# Altium PCB PCB1.PcbDoc
Units mm, origin at the board's own origin, x right, y up, seen from the top; angles counter-clockwise.
Board outline 16 x 16 mm, 4 copper layers (Top Layer, Int1 (GND), Int2 (GND), Bottom Layer), stack 1.369 mm thick; 23 components, 26 nets, 106 pads, 39 vias.
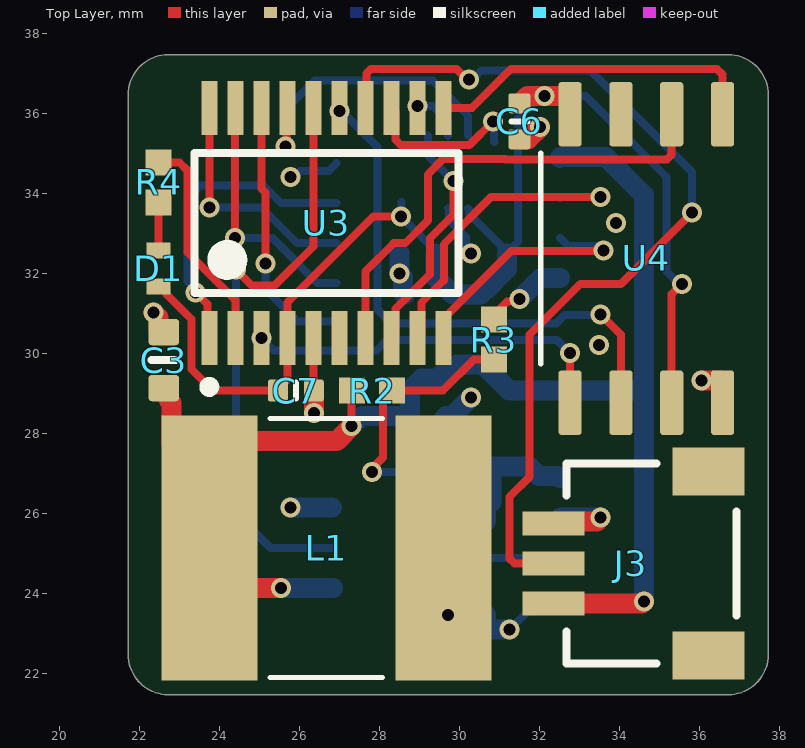
[diagram p0: Top Layer view]
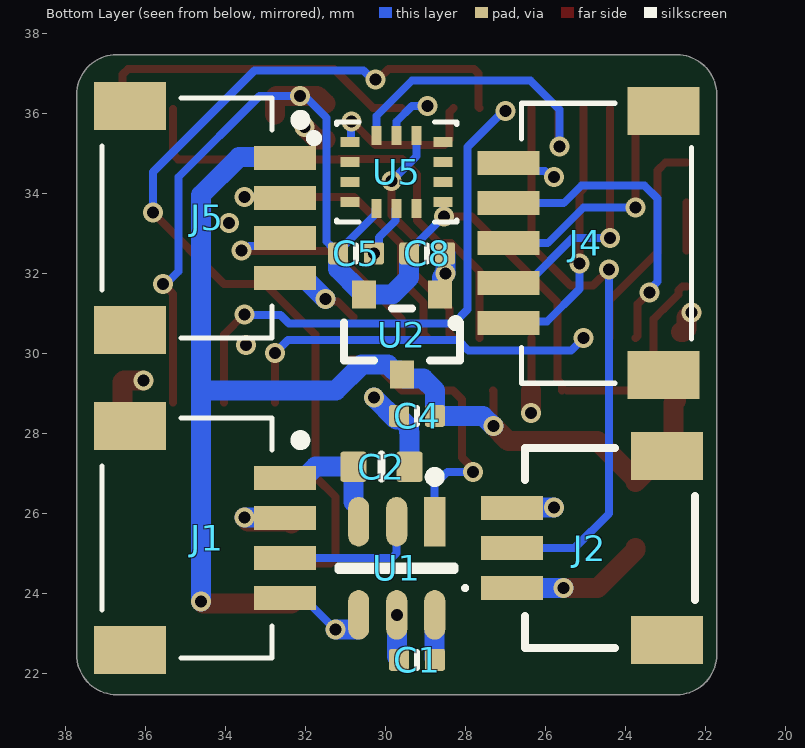
[diagram p1: Bottom Layer view, seen from below]
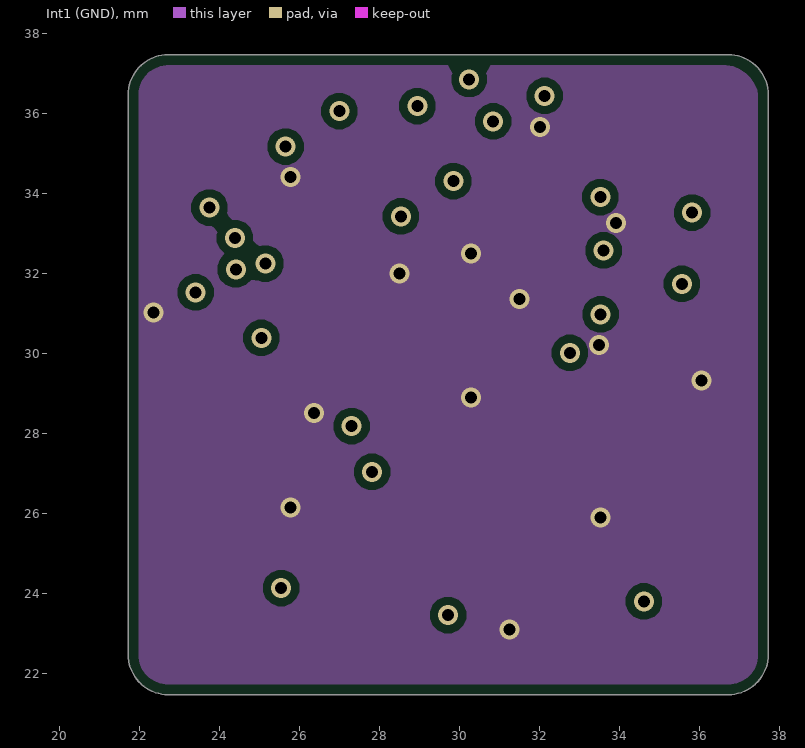
[diagram p2: Int1 (GND)]
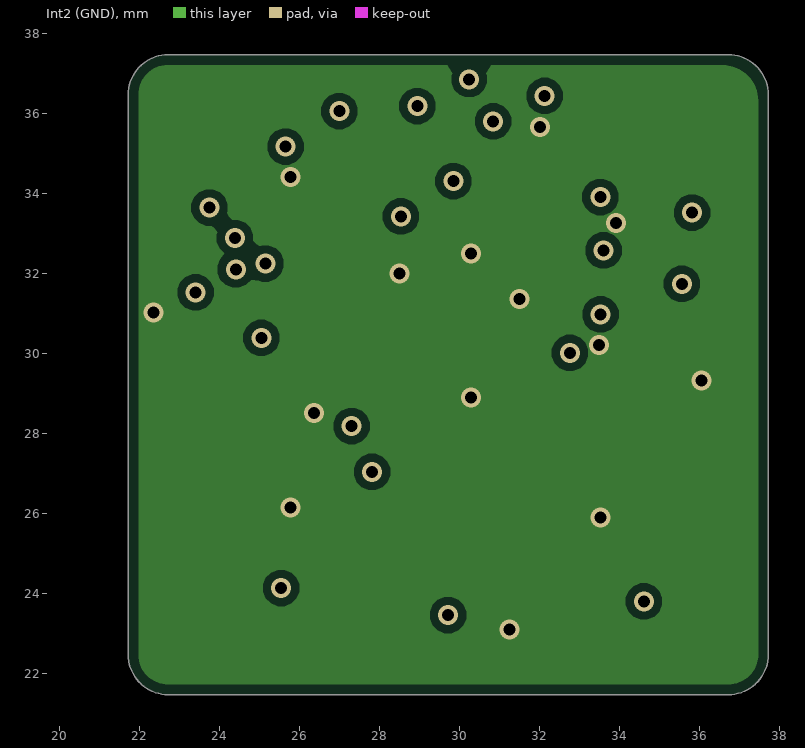
[diagram p3: Int2 (GND)]
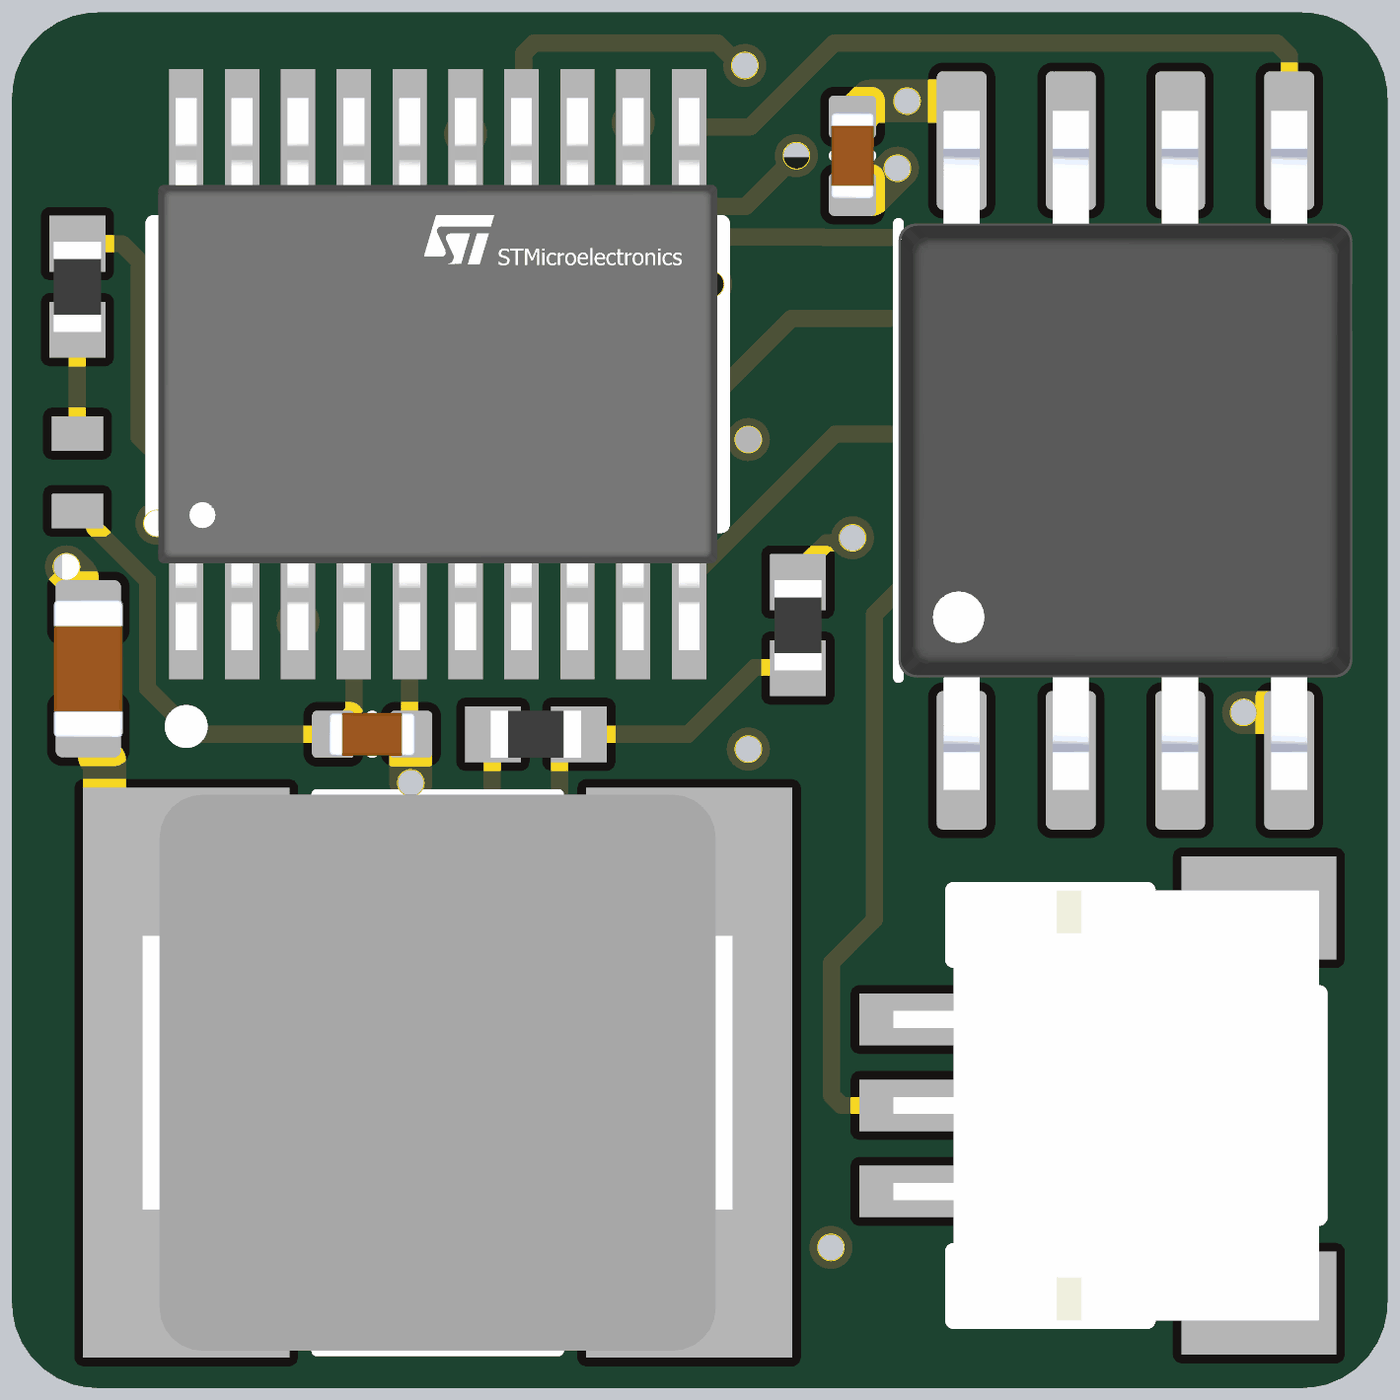
[diagram p4: 3D render of the assembled board from above, using the file's embedded part models]
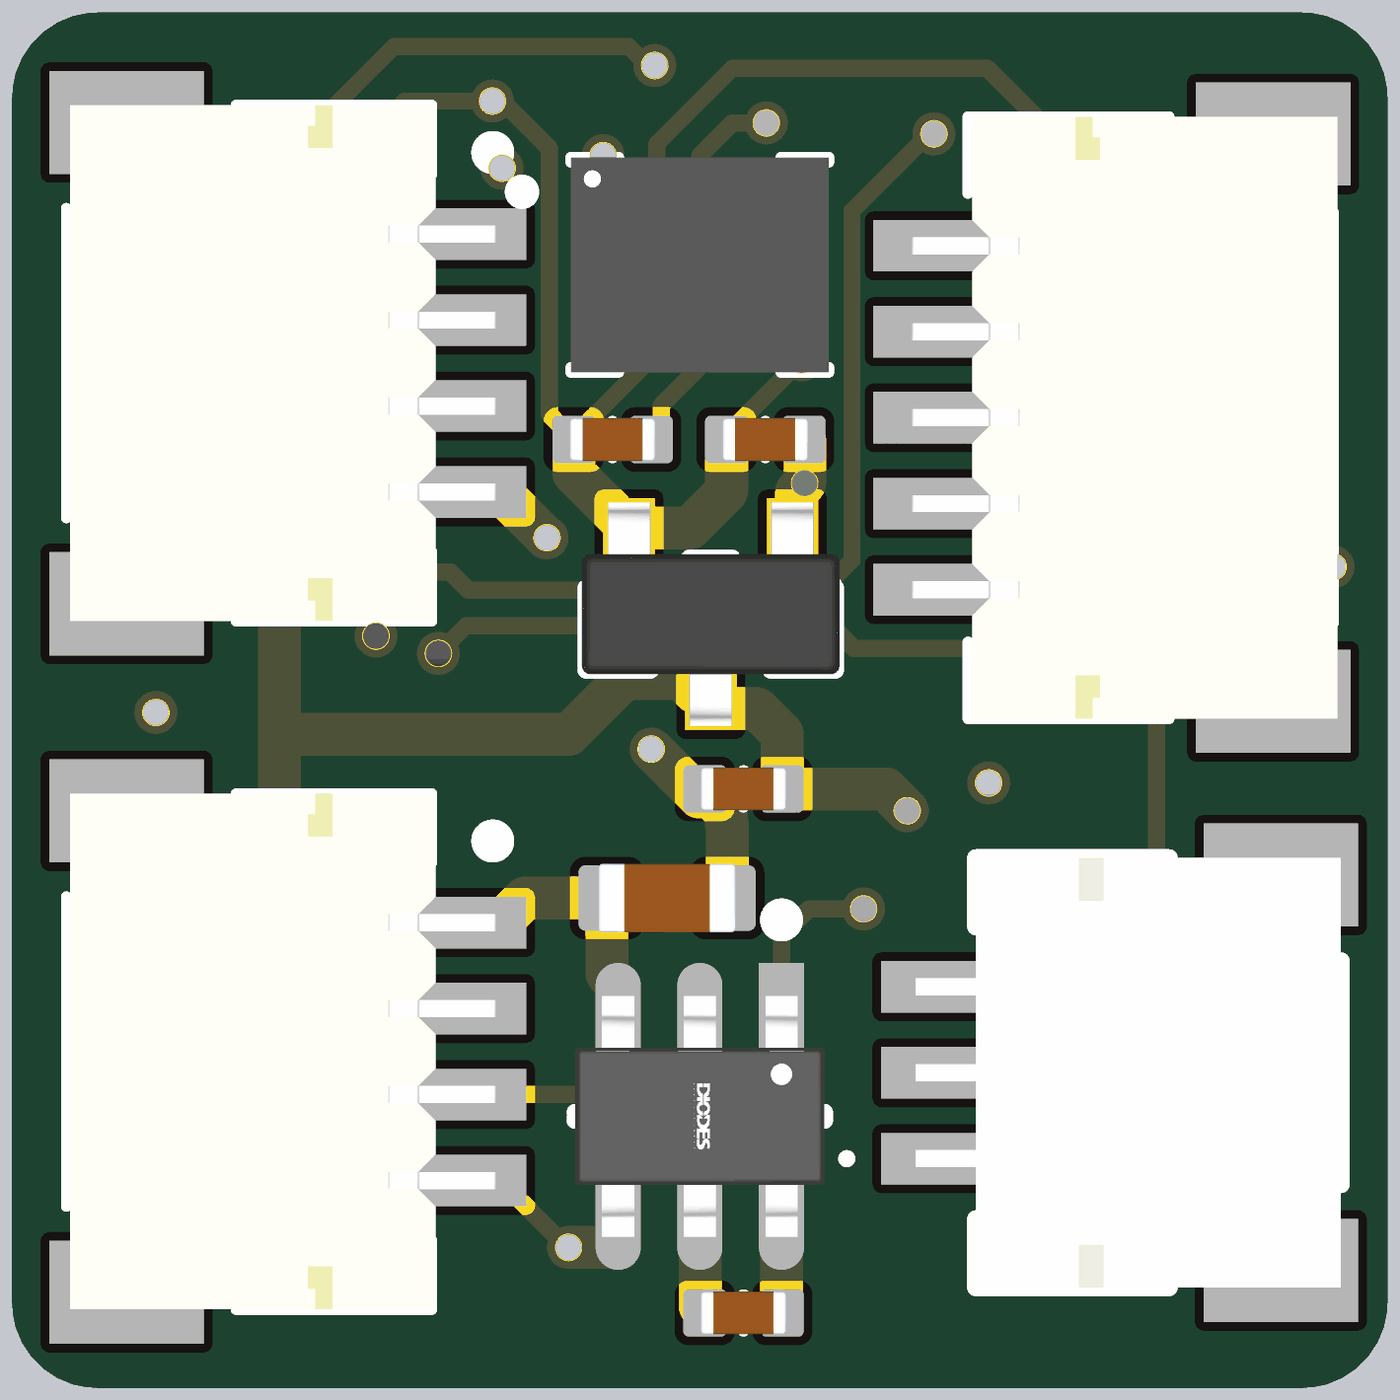
[diagram p5: 3D render of the assembled board from below, using the file's embedded part models]

## Layer stack, top to bottom
Top Solder: solder mask 0.0254, SM-001, Dk 4
Top Layer: signal copper 0.035
Dielectric 1: prepreg 0.1295, PP-017, Dk 4.3
Dielectric 2: prepreg 0.1295, PP-017, Dk 4.3
Int1 (GND): signal copper 0.035
Dielectric 3: core 0.7112, Core-039, Dk 4.8
Int2 (GND): signal copper 0.035
Dielectric 4: prepreg 0.1295, PP-017, Dk 4.3
Dielectric 5: prepreg 0.1295, PP-017, Dk 4.3
Bottom Layer: signal copper 0.035
Bottom Solder: solder mask 0.0254, SM-001, Dk 4

## Board outline
21.719,22.479 21.719,36.479 cw(c22.719,36.479) 22.719,37.479 36.719,37.479 cw(c36.719,36.479) 37.719,36.479 37.719,22.479 cw(c36.719,22.479) 36.719,21.479 22.719,21.479 cw(c22.719,22.479)

## Design rules (kind name [scope] priority, off if disabled: settings)
BoardOutlineClearance [All] p1: gap=0.254 ignorepadtopadclearanceinfootprint=FALSE except(0: Arc-SplitContinuation Track-SplitContinuation SMDPad-SplitContinuation THPad-SplitContinuation Via-SplitContinuation Fill-SplitContinuation Poly-SplitContinuation Region-SplitContinuation Text-OutlineEdge Text-CavityEdge Text-CutoutEdge Text-SplitBarrior Text-SplitContinuation)
Clearance [All] p1: gap=0.254 ignorepadtopadclearanceinfootprint=FALSE except(0.15: Arc-Arc Arc-Track Arc-SMDPad Track-Track Track-SMDPad; 0.2: Arc-Via Arc-Fill Arc-Poly Arc-Region Track-Via Track-Fill Track-Poly Track-Region SMDPad-SMDPad SMDPad-Via Via-Fill Via-Poly Via-Region)
MinimumSolderMaskSliver [All] p1: minsoldermaskwidth=0
PlaneConnect [All] p1: planeconnectstyle=Direct reliefexpansion=0.508 reliefentries=4 reliefconductorwidth=0.254 reliefairgap=0.254
PolygonConnect [All] p1: connectstyle=Direct reliefconductorwidth=0.254 reliefentries=4 polygonreliefangle="90 Angle" airgapwidth=0.254
RoutingVias [All] p1: holewidth=0.3 width=0.5 viastyle="Through Hole" minholewidth=0.3 minwidth=0.5 maxholewidth=0.3 maxwidth=0.5
SilkToSolderMaskClearance [IsPad] p1: minsilkscreentomaskgap=0 clearancetoexposedcopper=TRUE
SolderMaskExpansion SolderMaskExpansion_Via [IsVia] p1: expansion=0.102 istentingtop=TRUE
SolderMaskExpansion [All] p2: expansion=0.102 istentingtop=FALSE
SupplyNets "Schematic Supply Nets_3" [InNet('VBAT')] p1: voltage=0.000
SupplyNets "Schematic Supply Nets_2" [InNet('5V')] p2: voltage=0.000
SupplyNets "Schematic Supply Nets_1" [InNet('GND')] p3: voltage=0.000
SupplyNets "Schematic Supply Nets" [InNet('3V3')] p4: voltage=0.000
Width [All] p1: maxlimit=1 minlimit=0.2 preferedwidth=0.2 minimp=50.000000 maximp=50.000000 favimp=50.000000
27 further rules are at their usual default settings.

## Components (designator, comment, footprint, x,y, rotation, side; value= is the part's Value field where it differs from the comment)
C1 "GRM155R61E105KA12D" GRM155R61E105KA12D 29.21,22.352 r0 bottom value=1u
C2 "GRM188R61C226ME01D" GRM188R61C226ME01D 30.099,27.178 r180 bottom value=22u
C3 "GRM188R61C226ME01D" GRM188R61C226ME01D 22.606,29.845 r90 top value=22u
C4 "GRM155R61E105KA12D" GRM155R61E105KA12D 29.21,28.448 r0 bottom value=1u
C5 "GRM155R61E105KA12D" GRM155R61E105KA12D 30.734,32.512 r180 bottom value=1u
C6 "GRM155R61E105KA12D" GRM155R61E105KA12D 31.496,35.814 r270 top value=1u
C7 "GRM155R61E105KA12D" GRM155R61E105KA12D 25.908,29.083 r0 top value=1u
C8 "GRM155R61E105KA12D" GRM155R61E105KA12D 28.956,32.512 r180 bottom value=1u
D1 "RED" LTST-C281KRKT 22.479,32.131 r270 top
J1 "SM04B-SRSS-TB" SM04B-SRSS-TB 32.512,25.392 r270 bottom
J2 "SM03B-SRSS-TB" SM03B-SRSS-TB 24.384,25.146 r90 bottom
J3 "SM03B-SRSS-TB" SM03B-SRSS-TB 34.798,24.765 r90 top
J4 "SM05B-SRSS-TB" SM05B-SRSS-TB 23.049,32.766 r90 bottom
J5 "SM04B-SRSS-TB" SM04B-SRSS-TB 32.512,33.401 r270 bottom
L1 "IHLP2525CZER6R8M01" IHLP2525CZER6R8M01 26.67,25.146 r180 top value=6u8
R2 "RC0402FR-075K6L" RC0402FR-075K6L 27.813,29.083 r0 top value=5k6
R3 "RC0402FR-071KL" RC0402FR-071KL 30.861,30.353 r90 top value=1k
R4 "RC0402FR-071KL" RC0402FR-071KL 22.479,34.29 r90 top value=1k
U1 "AP63300QWU-7" AP63300QWU-7 29.718,24.638 r270 bottom
U2 "AP2138N-3.3TRG1" AP2138N-3.3TRG1 29.591,30.48 r270 bottom
U3 "STM32G031F8P6" STM32G031F8P6 26.67,33.274 r90 top
U4 "W25Q128JVSIQ" W25Q128JVSIQ 34.671,32.385 r90 top
U5 "ICM-45686" ICM-45686 29.718,34.544 r180 bottom

## Footprints (in the part's own frame and the unit in brackets; to place one, negate y for a bottom-side part, rotate by r counter-clockwise, add the part's x,y. Pads: shape width x height; smd on the part's side, far side on the other; paste and mask are expansions set on the pad)
AP2138N-3.3TRG1 [mm] "SOT23, 3-Leads, Body 2.9x1.3mm, Pitch 0.95mm"
  rect 0.7x0.6 smd paste-0.05: 1(-1,0.95) 2(-1,-0.95) 3(1,0)
  silkscreen extent -0.65,-1.45 0.65,1.45, body extent -1.3,-1.5 1.3,1.5, height 1.1
AP63300QWU-7 [mm]
  rect 1.24x0.526 smd paste+0 mask+0: 1(-1.165,0.95)
  rrect100% 1.24x0.526 smd paste+0 mask+0: 2(-1.165,0) 3(-1.165,-0.95) 4(1.166,-0.95) 5(1.166,0) 6(1.166,0.95)
  silkscreen extent -2.41,-1.45 0.05,1.45, body extent -1.4,-1.45 1.4,1.45, height 1
GRM155R61E105KA12D [mm] "Chip Capacitor, Body 1.0x0.5mm, Height 0.6mm, IPC High Density"
  rrect25% 0.5x0.55 smd: 1(-0.45,0) 2(0.45,0)
  silkscreen extent 0,-0.2 0,0.2, body extent -0.5,-0.25 0.5,0.25, height 0.6
GRM188R61C226ME01D [mm] "Chip Capacitor, Body 1.6x0.8mm, Height 1.0mm, IPC High Density"
  rrect25% 0.66x0.76 smd: 1(-0.7,0) 2(0.7,0)
  silkscreen extent 0,-0.3 0,0.3, body extent -0.8,-0.4 0.8,0.4, height 0.95
ICM-45686 [mm]
  rect 0.475x0.25 smd mask+0.05: 1(-1.162,0.75) 2(-1.162,0.25) 3(-1.162,-0.25) 4(-1.162,-0.75) 8(1.162,-0.75) 9(1.162,-0.25) 10(1.162,0.25) 11(1.162,0.75)
  rect 0.25x0.475 smd mask+0.05: 5(-0.5,-0.913) 6(0,-0.913) 7(0.5,-0.913) 12(0.5,0.913) 13(0,0.913) 14(-0.5,0.913)
  silkscreen extent -2.17,-1.25 1.5,1.25, body extent -1.5,-1.25 1.5,1.25, height 0.86
IHLP2525CZER6R8M01 [mm]
  rect 2.4x6.63 smd: 1(-2.925,0) 2(2.925,0)
  silkscreen extent -1.41,-3.23 1.41,3.23, body extent -3.43,-3.23 3.43,3.23, height 3
LTST-C281KRKT [mm] "SMD, 2-Leads, Body 1x0.5mm"
  rect 0.4x0.6 smd: 1(-0.45,0) 2(0.45,0)
  body extent -0.5,-0.25 0.5,0.25, height 0.25
RC0402FR-071KL [mm] "Chip Resistor, 2-Leads, Body 1.05x0.55mm, IPC Low Density"
  rect 0.65x0.65 smd: 1(-0.5,0) 2(0.5,0)
  body extent -0.53,-0.28 0.53,0.28, height 0.4
RC0402FR-075K6L [mm] "Chip Resistor, 2-Leads, Body 1.05x0.55mm, IPC Low Density"
  rect 0.65x0.65 smd: 1(-0.5,0) 2(0.5,0)
  body extent -0.53,-0.28 0.53,0.28, height 0.4
SM03B-SRSS-TB [mm] "SMD, 3-Leads, Body 5x4.25mm, Pitch 1mm"
  rect 0.6x1.55 smd: 1(-1,2.45) 2(0,2.45) 3(1,2.45)
  rect 1.2x1.8 smd: MP1(-2.3,-1.425) MP2(2.3,-1.425)
  silkscreen extent -2.5,-2.12 2.5,3.67, body extent -2.5,-2.13 2.5,2.82, height 2.96
SM04B-SRSS-TB [mm]
  rect 0.6x1.55 smd: 1(-1.5,0) 2(-0.5,0) 3(0.5,0) 4(1.5,0)
  rect 1.2x1.8 smd: S1(-2.8,-3.875) S2(2.8,-3.875)
  silkscreen extent -3,-4.57 3,0.48, body extent -3,-4.53 3,0.42, height 2.96
SM05B-SRSS-TB [mm]
  rect 0.6x1.55 smd: 1(-2,3.875) 2(-1,3.875) 3(0,3.875) 4(1,3.875) 5(2,3.875)
  rect 1.2x1.8 smd: S1(-3.3,0) S2(3.3,0)
  silkscreen extent -3.5,-0.7 3.5,5.3, body extent -3.5,-0.75 3.5,4.2, height 2.95
STM32G031F8P6 [mm]
  rect 1.35x0.4 smd paste+0 mask+0: 1(-2.875,2.925) 2(-2.875,2.275) 3(-2.875,1.625) 4(-2.875,0.975) 5(-2.875,0.325) 6(-2.875,-0.325) 7(-2.875,-0.975) 8(-2.875,-1.625) 9(-2.875,-2.275) 10(-2.875,-2.925) 11(2.875,-2.925) 12(2.875,-2.275) 13(2.875,-1.625) 14(2.875,-0.975) 15(2.875,-0.325) 16(2.875,0.325) 17(2.875,0.975) 18(2.875,1.625) 19(2.875,2.275) 20(2.875,2.925)
  silkscreen extent -4.22,-3.3 1.75,3.3, body extent -3.65,-3.55 3.65,3.55, height 0.25
W25Q128JVSIQ [mm]
  rrect25% 1.61x0.58 smd: 1(-3.605,1.905) 2(-3.605,0.635) 3(-3.605,-0.635) 4(-3.605,-1.905) 5(3.605,-1.905) 6(3.605,-0.635) 7(3.605,0.635) 8(3.605,1.905)
  silkscreen extent -2.64,2.64 2.64,2.64, body extent -3.95,-2.64 3.95,2.64, height 2.16

## Part data
C1 C4 C5 C6 C7 C8: "CAP 1U 25V X5R 0402", Dielectric=X5R, Voltage=25V, Manufacturer Part Number 1=GRM155R61E105KA12D, Size=0402
C2 C3: "CAP 22U 16V X5R 0603", Dielectric=X5R, Voltage=16V, Manufacturer Part Number 1=GRM188R61C226ME01D, Size=0603
D1: library part LTST-C281KRKT, "LED RED", Colour=RED, Manufacturer Part Number 1=LTST-C281KRKT, Size=0402
J1 J5: "JST-SH 4P", Manufacturer Part Number 1=SM04B-SRSS-TB
J2 J3: "JST-SH 3P", Manufacturer Part Number 1=SM03B-SRSS-TB
J4: "JST-SH 5P", Manufacturer Part Number 1=SM05B-SRSS-TB
L1: "IND 6.8U 4.5A 60m", Current Rating=4.5A, Manufacturer Part Number 1=IHLP2525CZER6R8M01
R2: "RES 5.6k 1% 62.5mW 0402", Tolerance=1%, Manufacturer Part Number 1=RC0402FR-075K6L, Size=0603
R3 R4: "RES 1k 1% 62.5mW 0402", Tolerance=1%, Manufacturer Part Number 1=RC0402FR-071KL, Size=0603
U1: "BUCK 3A", Manufacturer Part Number 1=AP63300QWU-7
U2: "LDO 3.3V 250mA", Manufacturer Part Number 1=AP2138N-3.3TRG1
U3: "MCU 64MHz 64KB 8KB", ComponentLink2Description=Datasheet, ComponentLink2URL=https://www.st.com/resource/en/datasheet/stm32g030f6.pdf, Manufacturer Part Number 1=STM32G031F8P6
U4: "FLASH - NOR Memory IC 128Mb (16M x 8) SPI - Quad I/O, QPI, DTR 133 MHz 8-SOIC", Package="SOIC-8 Winbond Electronics", Check_prices=https://www.snapeda.com/parts/W25Q128JVSIQ/Winbond/view-part/?ref=eda, Manufacturer Part Number 1=W25Q128JVSIQ, MF="Winbond Electronics", MP=W25Q128JVSIQ, SnapEDA_Link=https://www.snapeda.com/parts/W25Q128JVSIQ/Winbond/view-part/?ref=snap
U5: "Accelerometer, Gyroscope, 6 Axis Sensor I2C, I3C, SPI Output", Manufacturer Part Number 1=ICM-45686

## Via types
v1: diameter 0.5, hole 0.3, Top Layer to Bottom Layer, tented both sides, 39 vias

## Nets (pads, with @x,y where several pads share a name; then routed paths per layer and width w, separated by ;. In a path a pad name is that pad's centre, name@x,y a point inside that pad or via, vN(x,y) a via of type N, cw(c..) or ccw(c..) an arc to the next point about the centre after c; other vN are vias at no path point)
3V3: C5.1 C6.1 C7.1 C8.1 D1.2 U2.2 U3.4 U4.3 U4.8 U5.5 U5.8 | length 33.2
  Top Layer w0.2: D1.2 22.579,31.681 22.679,31.581 22.679,31.486 23.04,31.125 23.041,31.125 23.295,30.871 23.295,29.62 23.832,29.083 C7.1 ; C7.1@25.585,29.083 25.585,29.235 25.695,29.345 U3.4 25.695,31.283 27.85,33.438 v1(28.533,33.438) ; U4.3 35.306,31.496 v1(35.56,31.75)
  Top Layer w0.5: C6.1 31.521,36.264 31.706,36.449 v1(32.131,36.449) 32.726,36.449 32.766,36.409 U4.8
  Bottom Layer w0.2: v1(28.533,33.438) 28.544,33.45 28.544,33.783 U5.8 ; v1@28.565,33.438 28.565,33.411 29.256,32.72 29.256,32.662 C8.1 ; U5.5 30.243,33.606 30.243,33.494 31.034,32.703 31.034,32.662 C5.1 31.184,32.537 31.334,32.687 31.351,32.687 31.468,32.804 31.468,35.896 31.964,36.392 32.074,36.392 v1(32.131,36.449) 33.147,36.449 35.179,34.417 35.179,32.062 35.491,31.75 v1(35.56,31.75)
  Bottom Layer w0.5: C8.1 29.406,31.909 29.833,31.482 30.539,31.482 U2.2 30.541,31.53 30.591,31.58 30.641,31.58 31.184,32.123 C5.1
5V: C3.1 C4.1 J2.1 J3.1 J5.1 L1.2 R2.1 U2.3 | length 35
  Top Layer w0.2: v1(27.305,28.194) 27.305,29.075 R2.1
  Top Layer w0.5: C3.1 22.656,29.145 22.736,29.065 22.736,28.831 22.795,28.772 22.795,27.748 23.745,26.798 23.745,26.867 24.695,27.817 26.928,27.817 v1(27.305,28.194) ; L1.2 23.745,25.096 24.695,24.146 v1(25.543,24.146) ; J3.1 34.563,23.765 v1(34.609,23.811)
  Bottom Layer w0.5: v1(25.543,24.146) J2.1 ; v1(27.305,28.194) 27.559,28.448 C4.1 ; C4.1@28.76,28.473 28.76,29.087 29.053,29.38 29.541,29.38 29.591,29.43 U2.3 ; U2.3@29.591,29.53 29.641,29.58 29.785,29.58 29.934,29.729 30.596,29.729 31.242,29.083 34.609,29.083 ; J5.1 32.528,34.917 33.663,34.917 34.609,33.971 34.609,29.083 ; v1(34.609,23.811) 34.609,29.083
EN: J1.3 U1.2 | length 3.6
  Bottom Layer w0.2: U1.2@29.714,25.807 U1.2 29.718,25.019 29.845,24.892 J1.3
FB: R2.2 R3.1 U1.1 | length 7.1
  Top Layer w0.2: v1(27.813,27.051) 27.813,27.132 28.088,27.407 28.088,28.858 R2.2 29.583,29.083 30.361,29.861 R3.1@30.861,29.861
  Bottom Layer w0.2: v1(27.813,27.051) 28.448,27.051 28.768,26.731 U1.1
FLASH_CS: U3.3 U4.1 | length 9.3
  Top Layer w0.2: v1(32.76,30.024) 32.763,30.021 32.763,28.783 U4.1
  Bottom Layer w0.2: v1(25.045,30.399) 25.364,30.08 27.921,30.08 28.186,30.345 32.439,30.345 v1(32.76,30.024)
GND: C2.2 C3.2 C4.2 C5.2 C6.2 C7.2 C8.2 J1.2 J1.4 J2.3 J3.3 J4.5 J5.4 R3.2 U1.4 U2.1 U3.5 U4.4 U5.6 | length 18.1
  Top Layer w0.2: U3.5 26.345,29.223 C7.2@26.421,29.146 ; C7.2 C7.2@26.387,29.054 ; R3.2@30.797,30.917 31.193,31.312 31.439,31.312 v1(31.496,31.369)
  Top Layer w0.5: v1(22.352,31.031) 22.476,30.907 22.476,30.625 22.556,30.545 C3.2 ; v1(26.358,28.517) C7.2 ; C6.2 31.714,35.364 v1(32.018,35.668) ; J3.3 32.398,25.815 33.435,25.815 v1(33.528,25.908) ; v1(36.046,29.337) 36.048,29.335 36.536,29.335 36.576,29.295 U4.4
  Bottom Layer w0.2: v1(25.781,34.417) 25.862,34.417 26.011,34.566 26.724,34.566 J4.5 ; J2.3@26.818,26.162 J2.3 ; U5.6 29.743,33.606 29.743,33.331 30.167,32.907 30.167,32.629 v1(30.284,32.512) ; v1(31.245,23.114) 31.259,23.114 32.037,23.892 J1.4
  Bottom Layer w0.5: v1(25.781,26.162) J2.3@26.818,26.162 ; C8.2@28.503,32.508 28.499,32.505 v1(28.499,32.004) 28.591,31.912 28.591,31.53 U2.1 ; C2.2 29.399,28.033 29.41,28.044 29.41,28.173 29.66,28.423 C4.2 ; C4.2@29.728,28.355 v1(30.284,28.911) ; U1.4 30.668,23.126 30.68,23.114 v1(31.245,23.114) ; v1(31.496,31.369) 31.505,31.369 32.037,31.901 J5.4 ; J1.2 32.528,25.908 v1(33.528,25.908)
  other v1: 33.486,30.226 33.909,33.274
IMU_CS: U3.8 U5.12 | length 6
  Top Layer w0.2: U3.8 28.395,30.499 28.395,31.122 29.257,31.984 29.257,32.885 29.846,33.474 v1(29.846,34.319)
  Bottom Layer w0.2: U5.12 29.218,34.947 v1(29.846,34.319)
NetC1_1: C1.1 U1.6 | length 1.1
  Bottom Layer w0.5: C1.1 28.76,22.377 28.768,22.385 U1.6
NetD1_1: D1.1 R4.1 | length 1.2
  Top Layer w0.2: D1.1 R4.1
SPI1_MISO: U3.13 U5.1 | length 4.1
  Top Layer w0.2: U3.13 28.395,36.049 28.395,35.359 28.53,35.224 30.253,35.224 v1(30.843,35.814)
  Bottom Layer w0.2: v1(30.843,35.814) 30.862,35.795 30.862,35.313 U5.1
SPI1_MOSI: U3.17 U5.14 | length 7.6
  Top Layer w0.2: v1(25.654,35.179) 25.675,35.2 25.675,36.129 U3.17
  Bottom Layer w0.2: v1(25.654,35.179) 25.654,36.108 26.376,36.83 29.34,36.83 30.218,35.952 U5.14
SPI1_SCK: U3.12 U5.13 | length 1.3
  Bottom Layer w0.2: v1(28.945,36.195) 29.337,36.195 29.718,35.814 U5.13
SPI2_MISO: U3.15 U4.2 | length 13.7
  Top Layer w0.2: v1(26.995,36.068) U3.15 ; v1(33.528,30.988) 34.036,30.48 U4.2
  Bottom Layer w0.2: v1(26.995,36.068) 27.051,36.068 27.949,35.17 27.949,31.106 28.295,30.76 32.411,30.76 32.624,30.973 33.513,30.973 v1(33.528,30.988)
SPI2_MOSI: U3.11 U4.5 | length 8.4
  Top Layer w0.2: U3.11 30.307,36.149 31.283,37.125 36.432,37.125 36.576,36.981 U4.5
SPI2_SCK: U3.7 U4.6 | length 12.3
  Top Layer w0.2: U3.7 27.645,32.055 28.356,32.766 28.643,32.766 29.21,33.333 29.21,34.489 29.59,34.869 31.149,34.869 31.154,34.864 35.189,34.864 35.306,34.981 U4.6@35.306,36.117
STATUS_LED: R4.2 U3.2 | length 5.5
  Top Layer w0.2: R4.2 22.995,34.79 23.199,34.586 23.199,32.54 24.395,31.344 U3.2
SW: C1.2 L1.1 U1.5 | length 1.1
  Bottom Layer w0.5: C1.2 29.66,22.377 29.713,22.43 v1(29.713,23.468) U1.5
SWCLK: J4.2 U3.19 | length 6.2
  Top Layer w0.2: v1(24.384,32.893) U3.19@24.384,36.138
  Bottom Layer w0.2: v1@24.394,32.893 25.322,32.893 26.449,31.766 J4.2
SWDIO: J4.1 U3.18 | length 6.7
  Top Layer w0.2: U3.18 25.045,34.137 25.146,34.036 v1(25.146,32.258)
  Bottom Layer w0.2: v1(25.146,32.258) 25.146,31.623 25.966,30.803 26.887,30.803 J4.1
TIM1_CH4: J2.2 U3.16 | length 14.9
  Top Layer w0.2: v1(24.407,32.11) 24.809,31.708 25.374,31.708 26.345,32.679 U3.16
  Bottom Layer w0.2: v1(24.407,32.11) 24.407,26.012 25.273,25.146 J2.2
TIM3_CH2: J3.2 U3.14 | length 23.6
  Top Layer w0.2: U3.14 27.671,36.175 27.671,37.007 27.789,37.125 29.925,37.125 30.187,36.863 v1(30.243,36.863) ; J3.2 31.369,24.765 31.252,24.882 31.252,26.426 31.75,26.924 31.75,30.48 33.02,31.75 34.036,31.75 v1(35.814,33.528)
  Bottom Layer w0.2: v1(30.243,36.863) 30.324,36.863 30.545,37.084 33.274,37.084 35.814,34.544 v1(35.814,33.528)
USART1_RX: J4.4 U3.1 | length 7.8
  Top Layer w0.2: v1(23.405,31.538) 23.695,31.248 23.695,30.449 U3.1
  Bottom Layer w0.2: v1(23.405,31.538) 23.405,31.599 23.199,31.805 23.199,33.883 23.521,34.205 25.104,34.205 25.543,33.766 J4.4
USART1_TX: J4.3 U3.20 | length 6
  Top Layer w0.2: U3.20 23.747,36.147 23.747,33.657 v1(23.749,33.655)
  Bottom Layer w0.2: v1(23.749,33.655) 25.055,33.655 25.944,32.766 J4.3
USART2_RX: J5.3 U3.10 | length 6.4
  Top Layer w0.2: U3.10 29.595,30.874 31.296,32.575 33.591,32.575 v1(33.602,32.586)
  Bottom Layer w0.2: J5.3 32.712,32.701 33.405,32.701 33.52,32.586 v1(33.602,32.586)
USART2_TX: J5.2 U3.9 | length 8
  Top Layer w0.2: U3.9 29.045,30.499 29.045,31.277 29.607,31.839 29.607,32.74 30.788,33.921 v1(33.521,33.921)
  Bottom Layer w0.2: J5.2 32.532,33.921 v1(33.521,33.921)
VBAT: C2.1 J1.1 U1.3 | length 3.3
  Bottom Layer w0.5: U1.3 30.668,26.167 30.799,26.298 C2.1 31.751,27.178 31.987,26.942 32.462,26.942 J1.1
pads on no net: J1.S1 J1.S2 J2.MP1 J2.MP2 J3.MP1 J3.MP2 J4.S1 J4.S2 J5.S1 J5.S2 U3.6 U4.7 U5.2 U5.3 U5.4 U5.7 U5.9 U5.10 U5.11

## Polygon pours and split planes (outlines as drawn)
GND on Int1 (GND) "GND_L02_P000" (solid, pour order 0): 22.741,37.219 36.584,37.219 cw(c36.584,36.33) 37.473,36.33 37.473,22.352 cw(c36.838,22.352) 36.838,21.717 22.733,21.717 cw(c22.733,22.479) 21.971,22.479 21.971,36.449 cw(c22.741,36.449)
GND on Int2 (GND) "GND_L03_P001" (solid, pour order 1): 36.576,37.211 cw(c36.576,36.322) 37.465,36.322 37.465,22.345 cw(c36.77,22.412) 36.703,21.717 22.719,21.717 cw(c22.655,22.408) 21.964,22.345 21.964,36.576 cw(c22.73,36.445) 22.86,37.211

## Silkscreen, mask and mechanical layers (free items; w line width, h text height)
Mechanical 1:
  the board outline again, w0.254